# Altium PCB T35_V2.PcbDoc (part 2 of 5)
Units mil, origin at the board's own origin, x right, y up, seen from the top; angles counter-clockwise.
Board outline 2372.44 x 1023.62 mil, 12 copper layers (TOP, L2-G, L3, L4-G, L5, L6-V, L7-V, L8, L9-G, L10, L11-G, BOTTOM), stack 62.192 mil thick; 356 components, 288 nets, 1478 pads, 832 vias.
Unrouted connection lines stored in the file: 19.
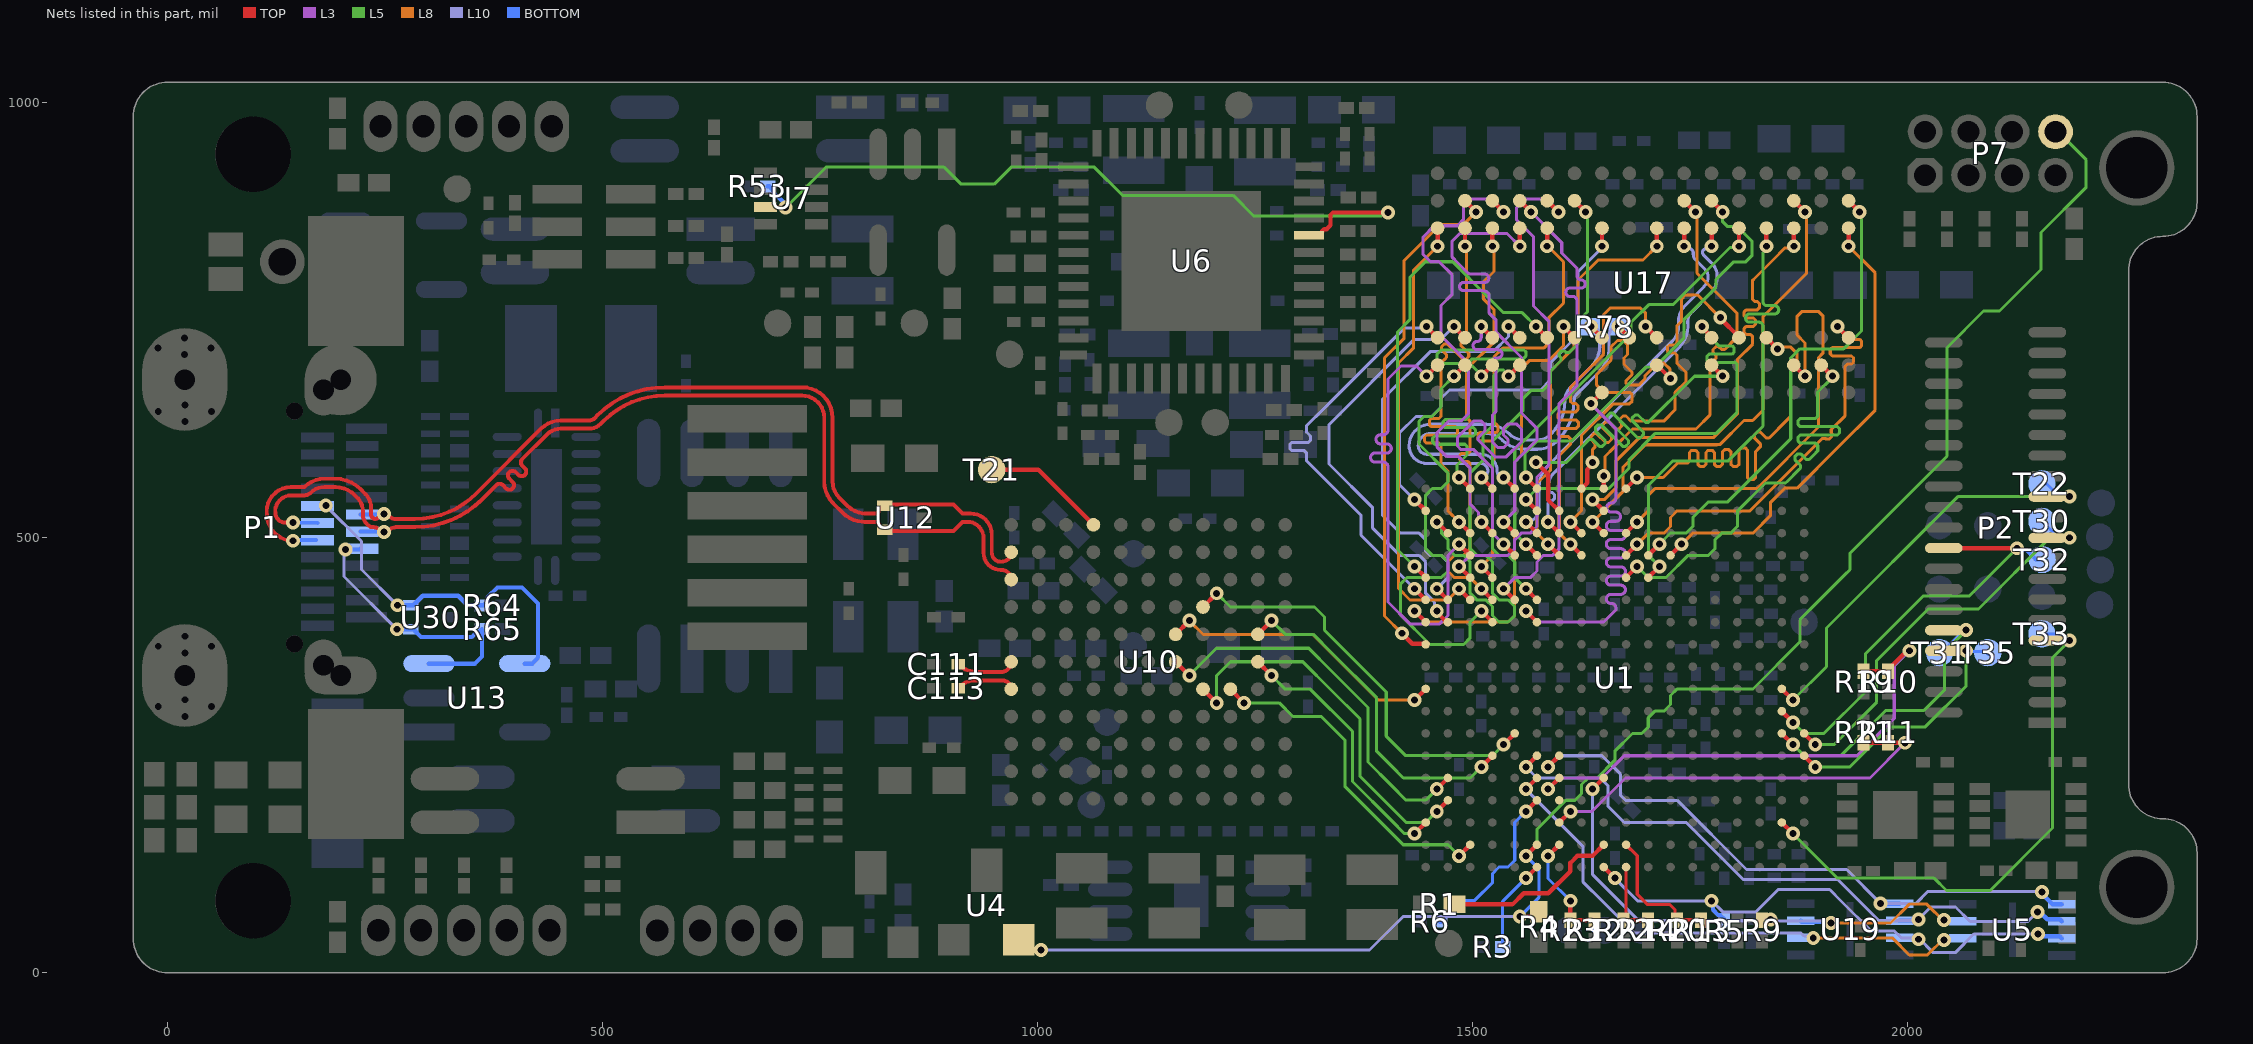
[diagram p12: the nets of this part, all layers, seen from the top]

## Part data
C1 C2 C3 C4 C6 C7 C8 C9 C10 C11 C13 C14 C15 C16 C17 C18 C21 C22 C24 C25 C27 C28 C29 C30 C31 C32 C33 C34 C35 C37 C38 C39 C41 C42 C43 C45 C47 C49 C51 C52 C54 C55 C57 C58 C60 C62 C63 C65 C66 C102 C103 C104 C105 C106 C107 C112 C114 C115 C118 C119 C120 C121 C138 C139 C140 C141 C142 C143 C144 C145 C146 C147 C148 C149 C150 C151 C152 C153 C154 C155 C156 C157 C158 C159: library part CAP, "贴片电容"
  C2 C4 C104 C119: ComponentLink1Description=Link, ComponentLink1URL=https://item.szlcsc.com/456838.html
  C6 C8 C10 C13 C15 C17 C21 C24 C27 C34 C37 C41 C51 C54 C57 C60 C62 C65 C102 C148 C149 C150 C151 C152 C153: Link=https://item.szlcsc.com/78065.html
  C7 C9 C11 C14 C16 C18 C22 C25 C28 C30 C31 C33 C35 C38 C39 C42 C43 C45 C47 C49 C52 C55 C58 C63 C66 C112 C115 C120 C138 C139 C140 C141 C154 C155 C156 C157 C158 C159: Link=https://item.szlcsc.com/456838.html
  C29 C142 C143 C144 C145: Link=https://item.szlcsc.com/54083.html
  C114: ComponentLink1Description=Link, ComponentLink1URL=https://item.szlcsc.com/3348367.html
  C146 C147: Link=https://item.szlcsc.com/152108.html
C5 C12 C19 C20 C23 C26 C36 C40 C44 C46 C48 C50 C53 C56 C59 C61 C64 C110 C111 C113 C116 C117 C122 C123 C124 C125 C126 C127 C128 C129 C130 C131 C132 C133 C134 C135 C136 C137: library part "CAPACITOR NON-POL", "贴片电容"
  C5 C12 C19 C20 C23 C26 C36 C40 C44 C46 C48 C50 C53 C56 C59 C61 C64: Link=https://item.szlcsc.com/359940.html
  C110 C122 C126: Link=https://item.szlcsc.com/3277786.html
  C111 C113: Link=https://item.szlcsc.com/456838.html, Text Field1=20, Text Field2=10
  C116: Text Field1=20, Text Field2=10
  C117 C123 C125 C127 C128 C129 C130 C131 C134 C135 C136 C137: Link=https://item.szlcsc.com/456838.html
  C124 C132 C133: Link=https://item.szlcsc.com/60514.html
C67 C68 C69 C70 C71 C72 C73 C74 C75 C76 C77 C79 C80 C81 C82 C83 C84 C85 C87 C88 C89 C90 C91 C92 C93 C94 C96 C97 C98 C99 C101: library part "0402 100nF (104) 10% 16V", "贴片电容"
  C67 C72: Link=https://item.szlcsc.com/3277786.html
  C68 C77 C80 C85 C88 C93 C94 C98 C99: Link=https://item.szlcsc.com/456838.html
  C69 C70: Link=https://item.szlcsc.com/315294.html
  C73: Link=https://item.szlcsc.com/54083.html
  C75: ComponentLink1Description=Link, ComponentLink1URL=https://item.szlcsc.com/78065.html
C78 C86 C95 C100: library part "3216 10uF (106) 10% 16V", "贴片电容", Link=https://item.szlcsc.com/60514.html
CRY1: library part CRY-4S, "无源晶振"
ECP1: library part ELECTRO1, "钽电容"
FB1 FB2 FB3 FB4 FB5 FB7 FB8 FB9: library part Inductor, "贴片磁珠"
  FB1 FB2 FB3 FB4 FB5: Link=https://item.szlcsc.com/948048.html
  FB7 FB8 FB9: Link=https://item.szlcsc.com/373740.html
FB6: library part INDUCTOR, "贴片磁珠"
L1 L2 L3 L4: library part INDUCTOR, "功率电感", Link=https://item.szlcsc.com/271084.html
L5: library part INDUCTOR, "功率电感", PartNumber=BDCD00201610R47MS1, Link=https://item.szlcsc.com/3012718.html
LED1: library part LED1, "红色LED", LatestRevisionDate=08-Jul-2005, LatestRevisionNote="Mech Layer 1 removed.", Link=https://item.szlcsc.com/142008.html, PackageReference=LED-1, Published=8-Jun-2000, Publisher="Altium Limited"
LED2: library part LED1, "绿色LED", LatestRevisionDate=08-Jul-2005, LatestRevisionNote="Mech Layer 1 removed.", Link=https://item.szlcsc.com/142012.html, PackageReference=LED-1, Published=8-Jun-2000, Publisher="Altium Limited"
LED3: library part LED1, "蓝色LED", LatestRevisionDate=08-Jul-2005, LatestRevisionNote="Mech Layer 1 removed.", Link=https://item.szlcsc.com/142013.html, PackageReference=LED-1, Published=8-Jun-2000, Publisher="Altium Limited"
P1: "USB Type-C连接器"
P2: "0.3mm间距39PinFPC插座"
P3 P5: library part "Header 5", "1.25mm间距5Pin插座", LatestRevisionDate=17-Jul-2002, LatestRevisionNote="Re-released for DXP Platform.", Publisher="Altium Limited"
P4: "导星口RJ11"
P6: library part Con_4, "1.25mm间距4Pin插座"
P7: library part 1.27mm2*4JTAGSocket, "1.25mm间距2*4 8PinJTAG烧写座", Link=https://item.szlcsc.com/3294771.html
P8: "弹簧针"
PAD1 PAD2 PAD3 PAD4: "固定孔"
R1 R2 R24 R25 R26 R27 R28 R29 R30 R31 R32 R33 R34 R35 R36 R37 R38 R39 R40 R41 R42 R43 R44 R45 R46 R47 R48 R49 R50 R51 R52 R53 R54 R55 R56 R64 R65 R66 R67 R98 R99 R100: library part RES1, "贴片电阻"
R3 R4 R5 R6 R7 R8 R9 R10 R11 R12 R13 R14 R15 R16 R17 R18 R19 R20 R21 R22 R23 R57 R58 R59 R60 R61 R62 R69 R74 R75 R76 R77 R78 R79 R80 R81 R82 R83 R84 R86 R87 R88 R89 R90 R91 R92 R93 R94 R95 R96 R97 R101 R102 R103 R104: library part RES2, "贴片电阻"
R68 R70 R71 R72: library part Res3, "贴片电阻", LatestRevisionDate=29-May-2009, LatestRevisionNote="IPC-7351 Footprint Added.", PackageDescription="Chip Resistor", PackageReference=J1-0603, Published=8-Jun-2000, Publisher="Altium Limited"
SJ1 SJ2: library part SolderableJumper
T1 T2 T3 T4 T5 T6 T8 T9 T10 T11 T12 T13 T14 T15 T16 T17 T18 T19 T20 T21 T22 T23 T24 T25 T26 T27 T28 T29 T30 T31 T32 T33 T34 T35 T36: library part TP, "测试点"
U1: "FPGA芯片", SPLIT_INST=TRUE, SWAP_INFO=(S1+S2+S3+S4+S5+S6+S7+S8+S9+S10+S11+S12+S13+S14+S15+S16+S17)
U2 U3: library part 24LC00, "贴片有源晶振"
U4 U14: library part MAX809, "复位芯片"
U5 U19: library part GD25Q64ESIG, "SPI Flash"
U6: "电源芯片", Package="VQFN-48 Texas Instruments", Availability=Good, MF="Texas Instruments", MP=TPS65400RGZT, Price="3.95 USD", SnapEDA_Link=https://www.snapeda.com/parts/TPS65400RGZT/Texas%20Instruments/view-part/?ref=snap
U7: library part TPS628501, "电源芯片"
U8: library part TPS793-XX, "电源芯片"
U9: "时序排序器"
U10: library part CYUSB3014, "FX3芯片"
U11: "USB过压过流保护芯片"
U12 U21 U28 U29 U30: "ESD保护器件"
U13: "比较器"
U15: "I2C电平转换芯片"
U16 U18: library part 24LC00, "EEPROM芯片", Text Field1=60, Text Field2=50
U17: library part MT41K512M16HA-125IT, "DDR3芯片"
U20 U22 U23 U24 U25 U26: library part TLP281_1, "光耦"
  U25: ComponentLink1Description=Link, ComponentLink1URL=https://item.szlcsc.com/91059.html
U27: "USB3.0选通芯片"

## Via types
v1: diameter 16, hole 8, TOP to BOTTOM, tented both sides, 832 vias

## Nets (pads, with @x,y where several pads share a name; then routed paths per layer and width w, separated by ;. In a path a pad name is that pad's centre, name@x,y a point inside that pad or via, vN(x,y) a via of type N, cw(c..) or ccw(c..) an arc to the next point about the centre after c; other vN are vias at no path point)
A0: U1.U15 U10.H5 | length 451.8
  TOP w5: U10.H5@1190.4,325.99 v1(1206.15,310.25) ; v1(1459.12,185.53) U1.U15@1471.91,198.32
  L5 w3.5: v1(1206.15,310.25) 1206.15,341.74 1221.9,357.49 1305.15,357.49 1338.2,324.44 1370.75,291.88 1370.75,225.89 1423.86,172.78 1446.37,172.78 v1(1459.12,185.53)
A1: U1.T17 U10.J5 | length 391.5
  TOP w5: U10.J5@1221.9,325.99 v1(1237.64,310.25) ; v1(1484.71,134.35) U1.T17@1497.5,147.14
  L5 w3.5: v1(1237.64,310.25) 1277.95,310.25 1293.7,294.5 1326.31,294.5 1353.75,267.05 1353.75,213.8 1420.41,147.14 1471.91,147.14 v1(1484.71,134.35)
aa_N: C111.1 U10.A6 | length 70.1
  TOP w4.5: C111.1@909,354.72 ccw(c930.99,376.71) 928.1,345.74 ccw(c930.99,376.71) 930.99,345.61 958.05,345.61 ccw(c958.05,357.49) U10.A6@969.93,357.49
aa_P: C113.1 U10.A5 | length 69.4
  TOP w4.5: C113.1@909,327 910.95,328.95 cw(c928.23,311.67) 928.23,336.11 959.81,336.11 cw(c959.81,325.99) U10.A5@969.93,325.99
AMPV: P2.23 T22.1 U1.B10 | length 520.7
  TOP w5: U1.B10@1855.77,326.28 v1(1868.57,313.48) ; P2.23@2161,547.24 2186.66,547.24 v1(2186.66,547.32)
  L5 w3.5: v1(1868.57,313.48) 1907,351.91 1907,396.2 2058.04,547.24 2186.59,547.24 v1(2186.66,547.32)
  BOTTOM w3.5: T22.1@2154.8,562 2159.91,562 2173.41,548.5 2184.5,548.5 v1@2185,548
CBSEL0: R13.2 R20.2 U1.J17 | length 153.7
  TOP w3.5: 1701.2,78.56 1726.89,78.56 1732.9,72.55 1732.9,62.93 R20.2@1735.33,60.49
  TOP w4: U1.J17@1676.64,147.14 1689.43,134.35 1689.43,90.32 1701.2,78.56
  TOP w5: R20.2@1735.33,60.49 R13.2@1762.99,60.49
CBSEL1: R14.2 R22.2 U1.J18 | length 89.8
  TOP w3.5: R22.2@1676.64,63.11 U1.J18@1676.64,121.55
  TOP w5: R22.2@1676.64,63.11 R22.2@1674.02,60.49 R14.2@1701.68,60.49
CBUS0: R10.2 R19.2 U1.M14 | length 598.1
  TOP w5: v1(1587.07,211.12) U1.M14@1599.87,223.91 ; R19.2@1949.85,346.46 R10.2@1977.94,346.46 1977.94,348.43 1999.66,370.15 v1(2002.37,370.15)
  L3 w3.5: v1(1587.07,211.12) 1599.82,223.87 1648.94,223.87 1674.55,249.48 1942.06,249.48 1985,292.43 1985,352.78 v1(2002.37,370.15)
CBUS1: R11.2 R21.2 U1.M16 | length 483.1
  TOP w5: U1.M16@1599.87,172.73 v1(1612.66,185.53) ; R21.2@1949.85,264.38 R11.2@1977.94,264.38 v1(1997.44,264.38)
  L3 w3.5: v1(1612.66,185.53) 1637.53,185.53 1675.96,223.96 1957.02,223.96 v1(1997.44,264.38)
CBUS2: R12.2 R23.2 U1.M17 | length 130.2
  TOP w5: v1(1587.07,134.35) U1.M17@1599.87,147.14 ; v1(1612.71,82.75) R23.2@1612.71,60.49 R12.2@1640.36,60.49
  BOTTOM w3.5: v1(1587.07,134.35) 1587.07,108.39 v1(1612.71,82.75)
CC1: P1.A5 R65.2 U13.3 U30.1 | length 336.2
  L10 w3.5: v1(204.69,486.62) 203,484.92 203,455.6 v1(263.72,394.88)
  BOTTOM w5: v1(204.69,486.62) 221.09,486.62 P1.A5@221.87,487.4 ; v1(263.72,394.88) U30.1@279.63,394.88 282.58,394.88 291.43,386.04 349.94,386.04 354.4,390.49 357.25,390.49 R65.2@361.64,394.88 361.64,363.58 353.41,355.35 U13.3@300.51,355.35
CC2: P1.B5 R64.2 U13.4 U30.2 | length 418.8
  L10 w3.5: v1(182,537) 223.12,495.87 223.12,463.57 v1(264.25,422.44)
  BOTTOM w5: v1(264.25,422.44) U30.2@279.63,422.44 282.58,422.44 293.58,433.44 334.18,433.44 345.18,422.44 R64.2@361.64,422.44 363.61,422.44 368,426.83 368,431.53 379.4,442.94 407.56,442.94 426,424.5 426,362.14 419.22,355.35 U13.4@410.74,355.35
CCK: U1.N13 U5.6 U19.6 | length 765.8
  TOP w5: v1(1561.48,236.71) U1.N13@1574.28,249.5
  L10 w3.5: v1(1561.48,236.71) 1574.23,223.96 1647.04,223.96 1655.97,215.03 1655.97,191.37 1674.65,172.69 1745.9,172.69 1811.38,107.2 1920.09,107.2 1928.17,99.12 1967.5,59.79 2012.79,59.79 v1@2013.59,60.59 ; v1(2012.79,61.39) 2026.93,75.53 2055.47,75.53 2071.82,59.18 2138.76,59.18 v1(2149.53,69.94)
  BOTTOM w5: U19.6@1991.08,59.79 v1@2012.79,59.79 ; v1(2149.53,69.94) 2152.5,69.94 2160.84,61.6 2175.22,61.6 U5.6@2177.64,59.18
CDI0: U1.M13 U5.5 U19.5 | length 733.6
  TOP w5: v1(1587.07,236.71) U1.M13@1599.87,249.5
  L10 w3.5: v1(1587.07,236.71) 1599.82,249.46 1649.13,249.46 1670.47,228.13 1670.47,203.77 1675.96,198.28 1735.42,198.28 1815.1,118.6 1928.17,118.6 1930.24,118.6 v1(1969.36,79.48) 2009.52,79.48 2023.66,93.61 2154.32,93.61 v1(2155.01,92.93)
  BOTTOM w5: v1(1969.36,79.48) U19.5@1991.08,79.48 ; v1(2155.01,92.93) 2155.01,90.67 2166.81,78.86 U5.5@2177.64,78.86
CDI1: U1.N14 U5.2 U19.2 | length 609.6
  TOP w5: v1(1561.48,211.12) U1.N14@1574.28,223.91
  L8 w3.5: v1(1891.85,40.05) 1891.9,40.11 1982.68,40.11 2002.37,20.42 2023.08,20.42 v1@2042.15,39.49
  L10 w3.5: v1(1561.48,211.12) 1627.06,145.54 1627.06,104.75 1649.78,82.02 1686.02,45.79 1877.73,45.79 1881.08,42.44 1889.46,42.44 v1(1891.85,40.05)
  other v1: 2042.15,37.89
CDI2: R9.1 U1.K14 U5.3 U19.3 | length 607.1
  TOP w5: v1(1638.25,211.12) U1.K14@1651.05,223.91 ; R9.1@1832.74,60.49 1833.59,61.34 v1(1842.98,61.34)
  L8 w3.5: v1(1912.24,57.22) 1980.73,57.22 2002.37,78.86 2022.46,78.86 v1@2042.15,59.18
  L10 w3.5: v1(1638.25,211.12) 1638.25,112.75 1691.21,59.79 1842.98,59.79 1843.49,59.28 1910.18,59.28 v1(1912.24,57.22)
  BOTTOM w5: U19.3@1877.3,59.79 1878.58,58.51 1910.96,58.51 v1(1912.24,57.22)
  other v1: 2042.15,60.78
CDI3: R5.1 U1.K18 U5.7 U19.7 | length 629.8
  TOP w5: U1.K18@1651.05,121.55 v1(1663.84,108.76)
  L10 w3.5: v1(1663.84,108.76) 1689.85,82.75 v1(1774.99,82.75) 1787.74,70 1825.97,70 1837.99,82.02 1851.57,95.6 1910.8,95.6 1924.38,82.02 1958.4,48 1985.05,48 1992.94,40.11 2012.79,40.11 2029.76,23.14 2055.14,23.14 2076.52,44.52 v1(2150.04,44.52)
  BOTTOM w5: v1(1774.99,82.75) 1776.6,81.14 1776.6,72.44 1783.11,65.93 1785.07,65.93 1789.46,61.55 R5.1@1789.46,59.58 ; v1(2150.04,44.52) 2153.02,44.52 2155.62,41.91 2175.22,41.91 U5.7@2177.64,39.49
  other v1: 2012.79,38.51
CDONE: R3.2 U1.N18 | length 108.2
  TOP w5: v1(1561.48,108.76) U1.N18@1574.28,121.55
  BOTTOM w3.5: R3.2@1534.83,29.67 1534.83,82.02 1534.83,82.11 v1(1561.48,108.76)
CHARGER_DECT: T21.1 U10.D11 | length 143.1
  TOP w5: T21.1@947.56,578.38 1001,578.38 U10.D11@1064.42,514.97
CLK_50MHz: R1.2 U1.K17 | length 205.7
  TOP w5: R1.2@1479.35,78.56 1521.44,78.56 1546.05,78.56 1558.96,91.47 1587.35,91.47 1612.66,116.78 1612.66,126.32 1620.69,134.35 1638.25,134.35 U1.K17@1651.05,147.14
CLK_OUT: R53.1 U6.44 U7.3 | length 919.4
  TOP w5: U7.3@687.68,880.25 687.9,880.02 710.41,880.02 v1(710.64,879.8) ; U6.44@1312.09,847.76 1324.29,847.76 1326.91,850.38 1326.91,851.9 1329.84,854.83 1332.52,854.83 1336.91,859.22 1336.91,871.07 1339.84,874 v1(1403,874)
  L5 w3.5: v1(710.64,879.8) 756.94,926.1 892.78,926.1 912.35,906.53 950.35,906.53 969.93,926.1 1065.42,926.1 1097.89,893.64 1225.07,893.64 1248.7,870 1395.62,870 1399.62,874 v1(1403,874)
  BOTTOM w5: R53.1@689.81,904 691.78,904 696.17,899.61 696.17,897.64 708.53,885.28 708.53,881.9 v1(710.64,879.8)
CMOS_CTL1: P2.10 T31.1 U1.B12 | length 379.8
  TOP w5: U1.B12@1855.77,275.09 v1(1868.57,262.3) ; P2.10@2041.92,393.7 v1(2067.58,393.77) v1(2067.58,393.77)
  L5 w3.5: v1(1868.57,262.3) 1881.36,249.5 1923.31,249.5 1975.48,301.68 2019.38,301.68 2042.93,325.23 2042.93,369.12 v1(2067.58,393.77)
  BOTTOM w3.5: T31.1@2037,368 2039.4,368 2067,395.6 v1@2067,397 ; v1@2063.66,391.66 v1@2066,394
CMOS_CTL2: P2.9 T33.1 U1.B16 | length 659.1
  TOP w5: U1.B16@1855.77,172.73 v1(1868.57,159.94) ; P2.9@2161,381.89 2186.66,381.89 v1(2186.66,381.96)
  L5 w3.5: v1(1868.57,159.94) 1919.79,108.71 2030.89,108.71 2045,94.6 2095.16,94.6 2166.88,166.32 2166.88,362.18 v1(2186.66,381.96)
  BOTTOM w3.5: T33.1@2154.8,389.55 2175.8,389.55 2183.35,382 v1@2188,382
CMOS_CTL3: P2.8 T35.1 U1.A13 | length 325.4
  TOP w5: U1.A13@1881.36,249.5 v1(1894.16,236.71) ; P2.8@2041.92,370.08 2067.58,370.08 v1(2067.58,370.15)
  L5 w3.5: v1(1894.16,236.71) 1934.19,236.71 1980.13,282.65 2020.67,282.65 2067.58,329.57 v1(2067.58,370.15)
  BOTTOM w3.5: v1(2067.58,370.15) 2068.66,369.08 v1@2069,369.08 ; v1@2069,371 v1@2069,369.08 ; T35.1@2093,366 2089.92,369.08 v1@2069,369.08
CMOS_CTL4: P2.19 T30.1 U1.A12 | length 504.7
  TOP w5: U1.A12@1881.36,275.09 v1(1894.16,262.3) ; P2.19@2161,500 v1(2186.66,500.07) v1(2186.66,500.07)
  L5 w3.5: v1(1894.16,262.3) 1916.02,262.3 1964.82,311.1 1964.82,359.02 2023.95,418.15 2081.83,418.15 2163.67,500 2186.59,500 v1(2186.66,500.07)
  BOTTOM w3.5: T30.1@2154.8,518.89 2173.41,500.28 2185.72,500.28 v1@2188,498
CMOS_CTL5: P2.18 T32.1 U1.B11 | length 516
  TOP w5: U1.B11@1855.77,300.69 v1(1868.57,287.89) ; P2.18@2041.92,488.19 2042.02,488.09 2125.91,488.09 v1(2126,488)
  L5 w3.5: v1(1868.57,287.89) 1881.36,275.09 1904.09,275.09 1951.85,322.85 1951.85,366.85 2018.17,433.17 2071.17,433.17 v1(2126,488)
  BOTTOM w5: v1@2124,488 2126.1,485.9 2136.93,485.9 2147.83,475 T32.1@2155,475 ; v1@2129.52,488.52 v1@2130,489
CRESET_N: P7.8 R4.2 U1.N17 U4.2 | length 1909.7
  TOP w5: v1(1554.52,64.49) 1570.78,64.49 R4.2@1576.4,70.11 ; v1(1561.48,134.35) U1.N17@1574.28,147.14
  L5 w3.5: v1(1561.48,134.35) 1574.23,147.1 1574.23,165.13 1607.43,198.32 1617.9,198.32 1625.41,205.84 1625.41,216.31 1633.06,223.96 1643.53,223.96 1663.84,244.27 1663.84,254.74 1684.15,275.05 1694.62,275.05 1702.18,282.61 1702.18,293.08 1709.79,300.68 1720.26,300.68 1727.86,308.29 1727.86,318.76 1735.1,325.99 1735.33,326.23 1822.58,326.23 1876.46,380.12 1876.46,405.71 1928.17,457.42 1934.19,463.43 1934.19,482.4 2045.58,593.79 2045.58,718.58 2087.65,760.65 2105.85,760.65 2153.6,808.4 2153.6,850.9 2205.6,902.9 2205.6,934.4 P7.8@2161,979
  L10 w3.5: v1(1004.38,26.09) 1381.88,26.09 1420.28,64.49 v1(1554.52,64.49)
  BOTTOM w3.5: v1(1554.52,64.49) 1576.4,86.37 1576.4,119.43 v1(1561.48,134.35)
CSI: R6.2 U1.N15 | length 201.7
  TOP w5: v1(1561.48,185.53) U1.N15@1574.28,198.32
  BOTTOM w3.5: R6.2@1464.78,58.7 1488.11,82.02 1489.36,83.28 1502.86,83.28 1523.05,103.47 1523.05,113.95 1530.61,121.51 1541.08,121.51 1548.73,129.16 1548.73,172.78 v1(1561.48,185.53) v1@1561.95,186
  BOTTOM w5: R6.2@1462.81,58.7 R6.2@1464.78,58.7
CSO: U1.M15
CTL1: U1.R13 U10.K7 | length 397.6
  TOP w5: U10.K7@1253.39,388.99 v1(1269.14,404.73) ; v1(1510.3,236.71) U1.R13@1523.09,249.5
  L5 w3.5: v1(1269.14,404.73) 1284.89,388.99 1317.01,388.99 1338.2,367.8 1390,316 1390,254.64 1406.8,237.85 1420.69,223.96 1497.55,223.96 v1(1510.3,236.71)
CTL4: U1.V10 U10.G7 | length 337
  TOP w5: U10.G7@1158.9,388.99 v1(1174.65,404.73) ; v1(1433.53,313.48) U1.V10@1446.32,326.28
  L8 w3.5: v1(1174.65,404.73) 1190.4,388.99 1316.21,388.99 1338.2,367 1391.71,313.48 1406.8,313.48 v1(1433.53,313.48)
CTL5: U1.U14 U10.G6 | length 452.2
  TOP w5: U10.G6@1158.9,357.49 v1(1174.65,341.74) ; v1(1459.12,211.12) U1.U14@1471.91,223.91
  L5 w3.5: v1(1174.65,341.74) 1205.92,373.01 1311.99,373.01 1338.2,346.8 1380,305 1380,242.19 1406.8,215.39 1423.82,198.37 1446.37,198.37 v1(1459.12,211.12)
CTL6: U1.V16 U10.K6 | length 315.9
  TOP w5: U10.K6@1253.39,357.49 v1(1269.14,341.74) ; v1(1433.53,159.94) U1.V16@1446.32,172.73
  L5 w3.5: v1(1269.14,341.74) 1284.89,325.99 1313.76,325.99 1362.25,277.5 1362.25,219.75 1406.8,175.2 1422.06,159.94 v1(1433.53,159.94)
  L10 w5: v1@1431.5,159.94 v1(1433.53,159.94)
CTL7: U1.P12 U10.H8 | length 491.4
  TOP w5: U10.H8@1190.4,420.48 v1(1206.15,436.23) ; v1(1535.89,262.3) U1.P12@1548.69,275.09
  L5 w3.5: v1(1206.15,436.23) 1221.9,420.48 1318.52,420.48 1330,409 1330,393.85 1338.2,385.66 1401,322.85 1401,272 1423.45,249.55 1436,249.55 ; 1436,249.5 1523.09,249.5 v1(1535.89,262.3)
D_N: P1.A7 P1.B7 U10.A10 U12.1 | length 1236.5
  TOP w4.5: v1(144.32,496.59) cw(c144.32,526.4) 114.51,525.65 cw(c142.11,530.36) 141.78,558.36 157.52,558.34 157.56,558.38 cw(c180.44,535.5) 180.44,567.86 193.08,567.86 cw(c193.08,527.1) 221.9,555.92 227.39,550.43 cw(c210.95,533.99) 234.2,533.99 234.2,526.26 ccw(c238.79,526.26) 235.54,523.02 ; 235.57,523 ccw(c238.75,526.18) 237.86,521.77 ccw(c238.75,526.18) 238.75,521.68 ccw(c238.75,526.18) 241.92,522.99 ; 241.93,523 244.5,525.56 cw(c249,521.06) v1(249,527.43) cw(c249,521.06) 253.5,525.56 ccw(c262.88,534.95) 262.88,521.68 284.26,521.68 ccw(c284.26,621.68) 324.19,530 ccw(c284.26,621.68) 354.97,550.97 429.41,625.41 ; 429.44,625.44 cw(c452.35,602.48) 452.35,634.91 484.51,634.91 ccw(c484.51,644.49) 491.28,637.72 494.57,641.01 cw(c571.81,563.78) 571.81,673 729.57,673 cw(c729.57,638.07) 764.5,638.07 764.5,564.72 ccw(c790.53,564.72) 772.13,546.31 ; 772.12,546.31 781.74,536.69 ccw(c803.03,557.98) 800.29,528 ccw(c803.03,557.98) 803.03,527.88 813.63,527.87 ccw(c813.63,532.37) 816.81,529.19 817.16,529.54 ccw(c814.83,531.88) 818.13,531.88 cw(c821.44,531.88) 819.09,534.21 U12.1@819.7,534.82 ; U12.1@824.74,536.9 ccw(c824.74,529.78) 819.71,534.82 823.26,538.37 903.5,538.37 914,527.87 923.42,527.87 cw(c923.42,503.74) 947.56,503.74 947.56,482.97 ccw(c958.05,482.97) 958.05,472.48 958.93,472.48 ccw(c958.93,483.47) U10.A10@969.93,483.47
  BOTTOM w4.5: v1(144.32,496.59) 144.97,497.24 P1.B7@170.69,497.24 ; P1.A7@221.87,526.77 P1.A7@223.67,526.77 248.34,526.77 v1(249,527.43)
D_P: P1.A6 P1.B6 U10.A9 U12.2 | length 1236.5
  TOP w4.5: v1(144.32,517.59) 135.41,517.59 cw(c135.41,529) 124.01,528.51 cw(c142.33,530.41) 142.33,548.83 157.54,548.84 ccw(c157.54,558.3) 164.23,551.61 ; 164.26,551.64 cw(c180.47,535.42) 180.47,558.36 193,558.36 cw(c193,526.9) 215.24,549.15 218.67,545.71 cw(c202.09,530.33) 224.7,530.33 224.7,526.23 ccw(c238.69,526.23) 228.8,516.33 230.24,514.89 ccw(c236.78,521.43) 236.78,512.18 cw(c236.78,502.93) 243.32,509.47 244.5,508.29 ccw(c249,512.79) v1(249,506.43) ccw(c249,512.79) 253.5,508.29 cw(c262.88,498.91) 262.88,512.18 284.37,512.18 ccw(c284.37,621.4) 326.19,520.5 ccw(c284.37,621.4) 335.33,524.8 ccw(c284.37,621.4) 361.6,544.17 369.05,551.61 378.06,560.63 cw(c381.77,556.91) 385.49,560.63 389.38,556.74 ccw(c393.09,560.45) 396.8,556.74 ccw(c393.09,560.45) 396.8,564.16 392.91,568.05 cw(c396.62,571.76) 392.91,575.48 cw(c396.62,571.76) 400.34,575.48 403.47,572.34 ccw(c407.19,576.05) 410.9,572.34 ccw(c407.19,576.05) 410.9,579.76 407.76,582.9 cw(c411.47,586.61) 407.76,590.33 436.11,618.67 437.25,619.74 cw(c452.38,602.4) 439.03,621.14 cw(c452.38,602.4) 452.38,625.41 484.58,625.41 ccw(c484.58,644.33) 497.95,630.95 501.21,634.21 cw(c571.92,563.5) 571.92,663.5 729.49,663.5 cw(c729.49,637.99) 755,637.99 755,564.68 ccw(c790.44,564.68) 765.35,539.65 ; 765.38,539.62 776.42,528.58 ccw(c801.06,553.23) 798.11,518.5 ccw(c801.06,553.23) 801.06,518.38 813.63,518.37 cw(c813.63,513.88) 816.81,517.06 817.16,516.71 cw(c814.83,514.37) 818.13,514.37 ccw(c821.44,514.37) 819.09,512.04 819.7,511.43 ccw(c824.74,516.47) U12.2@824.74,509.35 826.21,507.87 903.5,507.87 914,518.37 919.49,518.37 cw(c919.49,499.81) 938.06,499.81 938.06,482.97 ccw(c958.05,482.97) 958.05,462.98 958.93,462.98 cw(c958.93,451.98) U10.A9@969.93,451.98
  BOTTOM w4.5: v1(144.32,517.59) 144.64,517.26 172.16,517.26 P1.B6@172.49,516.93 ; P1.A6@221.87,507.09 P1.A6@223.67,507.09 248.34,507.09 v1(249,506.43)
DDR_A0: U1.P3 U17.N3 | length 575.6
  TOP w5: v1(1535.89,518.21) U1.P3@1548.69,505.41 ; v1(1554.52,835.13) U17.N3@1554.52,856
  L3 w3.5: v1(1535.89,518.21) 1548.73,531.05 1548.73,587.21 1574.52,612.99 1574.52,625.43 1556.47,643.47 1556.47,707.2 1526.97,736.7 1526.97,750.64 1519.39,758.22 1519.39,779.93 1517.64,781.68 ccw(c1511.9,775.94) 1511.9,784.05 1490.03,784.05 cw(c1490.03,788.8) 1490.03,793.55 1514.16,793.55 ccw(c1514.16,798.3) 1514.16,803.05 1498.23,803.05 cw(c1498.23,807.8) 1494.87,804.44 1482.86,816.46 1476.78,822.54 1476.78,841.24 1485.42,849.88 1539.77,849.88 v1(1554.52,835.13)
DDR_A1: U1.P4 U17.P7 | length 575.6
  TOP w5: v1(1510.23,742.81) U17.P7@1523.02,730.02 ; v1(1535.89,492.61) U1.P4@1548.69,479.82
  L3 w3.5: v1(1510.23,742.81) 1510.23,738.36 1510.23,730.49 cw(c1505.48,730.49) 1505.48,725.74 ccw(c1505.48,720.99) 1505.48,716.24 1529.33,716.24 cw(c1529.33,711.49) 1529.33,706.74 1527.89,706.74 ccw(c1527.89,701.99) 1523.14,701.99 1523.14,697.56 1526.97,693.73 1526.97,693.12 1526.97,644.97 1523.14,641.14 1523.14,610 1529.48,603.66 1535.89,603.66 1541.08,608.85 1541.08,613.17 1539.03,615.22 1538.89,615.22 1535.89,618.22 1535.89,625.82 1541.06,630.99 1550.57,630.99 1556.47,625.09 1556.47,610.54 1538.94,593 1526.04,593 1506.72,612.32 1506.72,615.22 1514.5,623 1514.5,629.86 1510.3,634.06 1501.44,634.06 1482.86,615.48 1482.86,605.52 1487.02,601.36 1501.64,601.36 1523.14,579.86 1523.14,505.36 v1(1535.89,492.61)
DDR_A2: U1.R6 U17.P3 | length 522.2
  TOP w5: v1(1510.3,441.43) U1.R6@1523.09,428.64 ; v1(1523.02,835.12) 1523.02,842.09 U17.P3@1523.02,856
  L8 w3.5: v1(1510.3,441.43) 1497.55,454.18 1479.52,454.18 1471.96,461.74 1471.96,472.31 1479.43,479.77 1489.9,479.77 1497.55,487.42 1497.55,579.63 1497.55,583.49 1497.55,585.24 1495.17,587.62 1487.52,587.62 1485.15,589.99 1485.15,594.74 1487.52,597.12 1495.17,597.12 1497.55,599.49 1497.55,603.4 1497.55,634 1493.48,638.07 1493.48,694 1525,725.52 1525,741 1524.98,762.2 1512.55,774.62 1512.55,793.75 1524.98,806.18 1524.98,833.02 v1@1522,836
DDR_A3: U1.P6 U17.N2 | length 575.6
  TOP w5: v1(1535.89,441.43) U1.P6@1548.69,428.64 ; U17.N2@1554.52,887.5 v1(1567.32,874.7)
  L3 w3.5: v1(1535.89,441.43) 1548.64,454.18 1566.67,454.18 1574.27,461.79 1574.27,472.26 1581.81,479.8 1592.28,479.8 1599.82,487.33 1599.82,654.36 1620.2,674.74 1620.2,732.2 1620.2,771.01 1620.2,772.76 ccw(c1615.45,772.76) 1615.45,777.51 1612.03,777.51 cw(c1612.03,782.26) 1612.03,787.01 1624.95,787.01 ccw(c1624.95,791.76) 1624.95,796.51 cw(c1624.95,801.26) 1620.2,801.26 1620.2,809.83 1609.97,820.06 1602.76,827.27 1602.76,839.25 v1(1567.32,874.7)
DDR_A4: U1.T1 U17.P8 | length 555.3
  TOP w5: v1(1484.71,569.39) U1.T1@1497.5,556.59 ; v1(1510.23,685.72) U17.P8@1523.02,698.52
  L5 w3.5: v1(1484.71,569.39) 1482.32,571.78 1482.32,583.72 1493.8,595.2 1493.8,603.4 1493.8,605.15 1491.43,607.53 1456.85,607.53 1454.48,609.9 1454.48,614.65 1456.85,617.03 1501.27,617.03 1503.65,619.4 1503.65,624.15 1501.27,626.53 1468.82,626.53 1466.44,628.9 1466.44,633.65 1468.82,636.03 1492.6,636.03 1495.48,638.9 1495.48,651.7 1495.48,689.84 1484.84,700.47 1461.17,700.47 1459.12,702.52 1459.12,710.95 1464.08,715.91 1559.43,715.91 1561.48,713.86 1561.48,708.79 1558.47,705.78 1499.78,705.78 1497.55,703.55 1497.55,699.86 1510.23,687.19 v1(1510.23,685.72)
DDR_A5: U1.R3 U17.P2 | length 580.3
  TOP w5: v1(1510.3,518.21) U1.R3@1523.09,505.41 ; U17.P2@1523.02,887.5 v1(1535.82,874.7)
  L3 w3.5: v1(1510.3,518.21) 1507.91,520.6 1507.91,525.6 1507,526.51 1507,529.06 1497.55,538.51 1497.55,579.86 1484.2,593.21 1470.6,593.21 1459.12,604.69 1459.12,620.58 1472.6,634.06 1487.02,634.06 1495.48,642.52 1495.48,700.7 1463.98,732.2 1463.98,767.1 1476.78,779.9 1476.78,802.21 1461.68,817.31 1451.79,817.31 1443.2,825.91 1443.2,845.58 1456.34,858.72 1482.86,858.72 1489.57,865.43 1489.57,880.81 1498.32,889.55 1520.96,889.55 v1(1535.82,874.7)
DDR_A6: U1.R7 U17.R8 | length 558.8
  TOP w5: v1(1478.73,685.72) U17.R8@1491.53,698.52 ; v1(1510.3,415.84) U1.R7@1523.09,403.05
  L5 w3.5: v1(1478.73,685.72) 1463.98,670.97 1463.98,650.11 1453.35,639.48 1444.31,639.48 1438.68,633.85 1438.68,607.86 1471.87,574.67 1471.87,564.11 1464.4,556.64 1453.93,556.64 1446.37,549.08 1446.37,487.33 1453.9,479.8 1464.38,479.8 1471.91,472.26 1471.91,461.79 1464.4,454.27 1424.98,454.27 1417.2,446.49 1417.2,411.6 1451.34,377.46 1489.94,377.46 1497.55,385.06 1497.55,403.09 v1(1510.3,415.84)
DDR_A7: U1.V8 U17.R2 | length 602.7
  TOP w5: v1(1419,390.25) 1430.92,378.33 1445.45,378.33 U1.V8@1446.32,377.46 ; U17.R2@1491.53,887.5 v1(1504.32,874.7)
  L8 w3.5: v1(1419,390.25) 1399.09,410.16 1399.09,706.89 1421.6,729.4 1421.6,818.8 1462.75,859.95 1489.57,859.95 v1(1504.32,874.7)
DDR_A8: U1.T4 U17.T8 | length 575.6
  TOP w5: v1(1447.24,685.72) U17.T8@1460.03,698.52 ; v1(1484.71,492.61) U1.T4@1497.5,479.82
  L3 w3.5: v1(1447.24,685.72) 1435.51,697.45 1418,697.45 1403,682.45 1403,675.6 1403,643.99 1403,623.7 cw(c1397.75,623.7) 1397.75,618.45 1394.39,618.45 ccw(c1394.39,613.2) 1394.39,607.95 1401.55,607.95 cw(c1401.55,602.7) 1401.55,597.45 1388.25,597.45 ccw(c1388.25,592.2) 1388.25,586.95 1397.75,586.95 cw(c1397.75,581.7) 1403,581.7 1403,579.95 1403,426.15 1428.04,401.11 1462.41,401.11 1471.96,410.65 1471.96,479.86 v1(1484.71,492.61)
DDR_A9: U1.T3 U17.R3 | length 522.6
  TOP w5: v1(1484.71,518.21) U1.T3@1497.5,505.41 ; v1(1491.53,835.13) U17.R3@1491.53,856
  L8 w3.5: v1(1484.71,518.21) 1471.87,531.05 1471.87,576.71 1469.18,579.4 1463.98,584.59 1463.98,603.4 1463.98,604.6 1463.98,606.35 1461.61,608.73 1447.36,608.73 1444.98,611.1 1444.98,615.85 1447.36,618.23 1480.61,618.23 1482.98,620.6 1482.98,625.35 1480.61,627.73 1452.91,627.73 1450.53,630.1 1450.53,634.85 1452.91,637.23 1461.61,637.23 1463.98,639.6 1463.98,645 1463.98,701 1468.94,705.96 1470.18,707.2 1470.18,710.56 1464.56,716.18 1464.56,719.54 1467.92,722.9 1471.28,722.9 1489.14,705.03 1492.5,705.03 1495.85,708.39 1495.85,711.75 1486.97,720.63 1486.97,723.99 1493.48,730.5 1493.48,835.52 v1@1492,837
DDR_A10: U1.V7 U17.L7 | length 529.2
  TOP w5: v1(1433.53,415.84) U1.V7@1446.32,403.05 ; v1(1604.72,742.81) U17.L7@1617.51,730.02
  L8 w3.5: v1(1433.53,415.84) 1446.28,403.09 1541.17,403.09 1548.64,410.56 1548.64,587.54 1556.47,595.38 1556.47,694.57 1565.9,704 1588,704 1604.72,720.72 1604.72,740.72 v1@1607,743
DDR_A11: U1.U7 U17.R7 | length 505.9
  TOP w5: v1(1459.12,415.84) 1459.12,414.21 1467.86,405.47 1468.18,405.47 1470.6,403.05 U1.U7@1471.91,403.05 ; v1(1478.73,742.81) U17.R7@1491.53,730.02
  L10 w3.5: v1(1459.12,415.84) 1456.73,418.23 1456.73,425.79 1446.28,436.24 1446.28,472.31 1438.81,479.77 1416.64,479.77 1385.41,511 1385.41,534.67 1335.21,584.87 1335.21,630.07 1433.2,728.06 1463.98,728.06 v1(1478.73,742.81)
DDR_A12: U1.U6 U17.N7 | length 496.6
  TOP w5: v1(1459.12,441.43) U1.U6@1471.91,428.64 ; v1(1541.72,742.81) U17.N7@1554.52,730.02
  L10 w3.5: v1(1459.12,441.43) 1471.87,454.18 1471.87,472.31 1464.4,479.77 1451.6,479.77 1446.28,485.1 1446.28,497.9 1438.81,505.36 1417.33,505.36 1396.82,525.88 1396.82,659.3 1451.5,713.98 1524.14,713.98 1541.65,731.48 1541.65,742.73 v1(1541.72,742.81)
DDR_A13: U1.T6 U17.T3 | length 531.4
  TOP w5: v1(1460.03,835.12) 1460.03,842.09 U17.T3@1460.03,856 ; v1(1484.71,441.43) U1.T6@1497.5,428.64
  L8 w3.5: v1(1460.03,835.12) 1432.49,807.58 1432.49,718.49 1415,701 1415,441.93 1428.34,428.59 1471.87,428.59 v1(1484.71,441.43)
DDR_A14: U1.V6 U17.T7 | length 502.2
  TOP w5: v1(1433.53,441.43) U1.V6@1446.32,428.64 ; v1(1447.24,742.81) U17.T7@1460.03,730.02
  L10 w3.5: v1(1433.53,441.43) 1372,502.96 1372,526 1309.2,588.8 1309.2,596.1 1309.2,597.85 1306.82,600.23 1292.57,600.23 1290.2,602.6 1290.2,607.35 1292.57,609.73 1311.68,609.73 1314.05,612.1 1314.05,616.85 1311.68,619.23 1311.57,619.23 1309.2,621.6 1309.2,628.4 1329.25,648.45 1330.91,650.11 1422.14,741.34 1445.76,741.34 v1@1446.82,742.4 ; v1(1447.24,742.81) v1@1446.82,742.4 ; v1@1449.6,742.4 v1@1446.82,742.4
DDR_A15: U1.V5 U17.M7 | length 565.8
  TOP w5: v1(1433.53,467.02) U1.V5@1446.32,454.23 ; v1(1573.22,742.81) U17.M7@1586.02,730.02
  L5 w3.5: v1(1433.53,467.02) 1414,486.55 1414,736.68 1428.13,750.8 1428.13,799.2 1446.24,817.31 1477.32,817.31 1515.68,778.96 1535.89,758.75 1557.28,758.75 v1(1573.22,742.81)
DDR_BA0: U1.T5 U17.M2 | length 599.6
  TOP w5: v1(1484.71,467.02) U1.T5@1497.5,454.23 ; U17.M2@1586.02,887.5 v1(1598.81,874.7)
  L3 w3.5: v1(1484.71,467.02) 1497.46,479.77 1541.08,479.77 1548.68,487.38 1548.68,497.85 1556.22,505.39 1566.69,505.39 1574.32,513.01 1574.32,569.88 1587.97,583.53 1587.97,748.92 1570.36,766.53 1570.36,846.07 1550.57,865.86 1550.57,879.03 1560.99,889.45 1584.06,889.45 v1(1598.81,874.7) v1@1600.77,872.75
DDR_BA1: U1.U3 U17.N8 | length 558.4
  TOP w5: v1(1459.12,518.21) U1.U3@1471.91,505.41 U1.U3@1471.91,506.72 ; v1(1541.72,685.72) U17.N8@1554.52,698.52
  L5 w3.5: v1@1462.44,518.21 1464.81,515.84 1464.81,504.96 1471.96,497.81 1471.96,487.33 1479.47,479.82 1489.94,479.82 1497.48,472.28 1497.48,436.22 1505.07,428.63 1515.55,428.63 1523.08,421.1 1523.08,410.62 1530.61,403.09 1541.17,403.09 1548.64,410.56 1548.64,421.12 1541.12,428.64 1530.65,428.64 1523.07,436.22 1523.07,472.28 1515.55,479.81 1505.07,479.81 1497.55,487.33 1497.55,574.67 1512.15,589.27 1512.15,617.71 1524.98,630.54 1524.98,687.13 1530.7,692.85 1535.82,692.85 1541.72,686.95 v1(1541.72,685.72)
DDR_BA2: U1.R5 U17.M3 | length 520.6
  TOP w5: v1(1510.3,467.02) U1.R5@1523.09,454.23 ; v1(1586.02,835.12) U17.M3@1586.02,856
  L8 w3.5: v1(1510.3,467.02) 1523.14,479.86 1523.14,588.12 1524.98,589.95 1524.98,607.29 1524.98,609.04 1522.6,611.42 1508.62,611.42 1506.25,613.79 1506.25,618.54 1508.62,620.92 1527.35,620.92 1529.73,623.29 1529.73,628.04 1527.35,630.42 1524.98,632.79 1524.98,637.27 1524.98,654.61 1524.98,708 1534.98,718 1581.95,718 1587.97,724.02 1587.97,753.02 1604.72,769.77 1604.72,817.28 1586.88,835.12 v1(1586.02,835.12)
DDR_C\A\S\: U1.V2 U17.K3 | length 505.9
  TOP w5: v1(1433.53,543.8) U1.V2@1446.32,531 ; v1(1649.01,835.12) 1649.01,842.09 U17.K3@1649.01,856
  L10 w3.5: v1(1433.53,543.8) 1416.24,561.09 1416.24,620.6 1435.11,639.48 1453.35,639.48 1463.98,650.11 1463.98,660.34 1473.64,670 1578.36,670 1589.57,681.22 1589.57,701.27 1621.46,733.16 1621.46,805.74 1649.01,833.29 v1(1649.01,835.12)
DDR_C\S\: U1.N6 U17.L2 | length 554.8
  TOP w5: v1(1561.48,441.43) U1.N6@1574.28,428.64 ; U17.L2@1617.51,887.5 v1(1630.31,874.7)
  L5 w3.5: v1(1561.48,441.43) 1548.73,454.18 1548.73,472.21 1541.17,479.77 1530.7,479.77 1523.14,487.33 1523.14,611.12 1558.47,646.45 1558.47,659.6 1558.47,660.34 1567.28,669.15 1580.56,669.15 1589.97,678.55 1589.97,691.83 1600.7,702.57 1601.94,703.81 1601.94,706.81 1599.87,708.89 1599.87,711.89 1602.87,714.9 1605.88,714.9 1607.95,712.82 1610.96,712.82 1611.44,713.31 1611.7,713.31 1621.46,723.07 1621.46,729.67 1621.46,736.27 1621.46,748.92 1632.26,759.72 1632.26,872.75 v1(1630.31,874.7)
DDR_CK_N: R78.1 U1.R1 U17.K7 | length 487
  TOP w5: v1(1510.3,569.39) U1.R1@1523.09,556.59 ; v1(1636.21,742.81) U17.K7@1649.01,730.02
  L10 w3.6: v1(1510.3,569.39) ccw(c1510.3,576.88) 1517.79,576.88 1517.79,577.16 ccw(c1509.46,577.16) 1509.46,585.5 1447.64,585.5 cw(c1447.64,605.88) 1427.27,605.88 cw(c1451.94,605.88) 1451.94,630.55 1516.24,630.55 cw(c1516.24,594.62) 1541.65,620.02 1541.72,619.95 ccw(c1559.84,638.07) 1559.84,612.44 1574.36,612.44 ccw(c1574.44,634.85) 1590.33,619.05 ccw(c1551.3,657.98) 1606.43,657.98 cw(c1626.79,657.98) 1612.38,672.37 ; 1612.39,672.38 1636.21,696.2 ; v1(1636.21,742.81) cw(c1636.21,732.62) 1639.82,742.15 cw(c1636.21,732.62) 1645.74,736.23 cw(c1636.21,732.62) 1646.4,732.62 1646.4,720.8 cw(c1611.62,720.8) 1636.24,696.23
DDR_CK_P: R78.2 U1.P1 U17.J7 | length 487.7
  TOP w5: v1(1535.89,569.39) U1.P1@1548.69,556.59 ; v1(1667.71,742.81) U17.J7@1680.5,730.02
  L10 w3.6: v1(1535.89,569.39) cw(c1535.89,576.88) 1528.39,576.88 1528.39,577.16 ccw(c1509.46,577.16) 1509.46,596.1 1447.64,596.1 cw(c1447.64,605.88) 1437.87,605.88 cw(c1451.94,605.88) 1451.94,619.95 1516.13,619.95 cw(c1516.13,594.36) 1534.23,612.45 1534.28,612.4 ccw(c1559.77,637.89) 1559.77,601.84 1574.54,601.84 ccw(c1574.46,634.8) 1579.08,602.16 1579.54,602.24 ccw(c1574.44,634.85) 1584.47,603.4 ccw(c1574.44,634.85) 1597.52,611.25 1597.9,611.63 ccw(c1551.56,657.87) 1617.03,657.92 cw(c1627.06,657.87) 1619.95,664.95 1646.68,691.68 ccw(c1621.78,716.59) 1657,716.59 1657,732.1 cw(c1667.71,732.1) v1(1667.71,742.81)
DDR_CKE: U1.N7 U17.K9 | length 575.6
  TOP w5: v1(1561.48,415.84) U1.N7@1574.28,403.05 ; v1(1636.21,654.23) U17.K9@1649.01,667.02
  L3 w3.5: v1(1561.48,415.84) 1574.23,403.09 1651.09,403.09 1665,417 1665,417.5 1665,419.26 ccw(c1659.75,419.26) 1659.75,424.51 1659.25,424.51 cw(c1659.25,429.76) 1659.25,435.01 1670.75,435.01 ccw(c1670.75,440.26) 1670.75,445.51 1659.25,445.51 cw(c1659.25,450.76) 1659.25,456.01 1670.75,456.01 ccw(c1670.75,461.26) 1670.75,466.51 1659.25,466.51 cw(c1659.25,471.76) 1659.25,477.01 1670.75,477.01 ccw(c1670.75,482.26) 1670.75,487.51 1659.25,487.51 cw(c1659.25,492.76) 1659.25,498.01 1670.75,498.01 ccw(c1670.75,503.26) 1670.75,508.51 1659.25,508.51 cw(c1659.25,513.76) 1659.25,519.01 1665.14,519.01 ccw(c1665.14,524.26) 1665.14,529.51 1659.75,529.51 cw(c1659.75,534.76) 1659.75,540.01 ccw(c1659.75,545.26) 1665,545.26 1665,554.11 1665,559.32 1665,603.4 1665,625.44 v1(1636.21,654.23)
DDR_DM0: U1.L1 U17.E7 | length 475.7
  TOP w5: U1.L1@1625.46,556.59 1632,563.13 1632,578.38 1638.25,584.63 v1(1638.25,586.81) ; v1(1785,753) 1785,752.25 1806.49,730.76 U17.E7@1806.49,730.02
  L8 w3.5: v1(1638.25,586.81) 1638.25,601.65 1640,603.4 1641.24,604.64 1641.24,608 1636.31,612.93 1636.31,616.29 1639.67,619.65 1643.02,619.65 1653.15,609.52 1656.5,609.52 1659.86,612.88 1659.86,616.24 1649.74,626.36 1649.74,629.72 1653.1,633.08 1656.46,633.08 1664.77,624.77 1668.13,624.77 1671.49,628.13 1671.49,631.49 1669.79,633.19 1669.79,636.55 1673.14,639.91 1676.5,639.91 1682.41,634 1697.64,634 1720,634 1733.04,647.04 1733.04,667.21 1745.52,679.68 1745.52,690.47 1735.36,700.63 1735.36,706.3 1735.36,707.8 1735.36,708.08 1735.36,709.83 1732.98,712.21 1726.52,712.21 1724.15,714.58 1724.15,719.33 1726.52,721.71 1732.98,721.71 1735.36,724.08 1735.36,733.83 1735.36,743.79 1740.29,748.71 1740.29,760.2 1740.29,774.29 1745,779 1759,779 v1(1785,753) v1@1786,752
DDR_DM1: U1.H5 U17.D3 | length 570
  TOP w5: U1.H5@1702.23,454.23 v1(1715.02,467.02) ; v1(1837.98,835.12) 1837.98,842.09 U17.D3@1837.98,856
  L5 w3.5: v1(1715.02,467.02) 1702.27,479.77 1702.27,560.2 1730.58,588.5 1794.26,588.5 1809.16,603.4 1834.03,628.27 1834.03,741.34 1834.03,743.09 ccw(c1829.28,743.09) 1829.28,747.84 1818.78,747.84 cw(c1818.78,752.59) 1818.78,757.34 1847.48,757.34 ccw(c1847.48,762.09) 1847.48,766.84 1838.78,766.84 cw(c1838.78,771.59) 1834.03,771.59 1834.03,823 1834.03,827.79 1836.01,829.77 1837.98,831.74 v1(1837.98,835.12)
DDR_DQ0: U1.N4 U17.E3 | length 514.9
  TOP w5: v1(1561.48,492.61) U1.N4@1574.28,479.82 ; v1(1806.49,835.13) U17.E3@1806.49,856
  L5 w3.5: v1(1561.48,492.61) 1548.73,505.36 1548.73,600.98 1682.46,734.71 1682.46,747.61 1702.9,768.05 1730.56,768.05 1796.2,833.68 1805.04,833.68 v1(1806.49,835.13)
DDR_DQ1: U1.N2 U17.F7 | length 510.8
  TOP w5: v1(1561.48,543.8) U1.N2@1574.28,531 ; v1(1764,743) 1764,742 1774.99,731.01 U17.F7@1774.99,730.02
  L5 w3.5: v1(1561.48,543.8) 1574.32,556.64 1656.64,556.64 1680.02,580.02 1680.02,589.77 1710.31,620.06 1780.26,620.06 1804.1,643.9 1804.1,699.86 1802.35,701.62 1772.2,701.62 1769.83,703.99 1769.83,708.74 1772.2,711.12 1798.61,711.12 1800.98,713.49 1800.98,718.24 1798.61,720.62 1783.35,720.62 1766.34,737.62 v1@1764,739.96 ; v1@1762.72,741.24 v1@1764,739.96 ; v1(1764,743) 1764,741.24 v1@1764,739.96
DDR_DQ2: U1.N1 U17.F2 | length 508.1
  TOP w5: v1(1561.48,569.39) U1.N1@1574.28,556.59 ; U17.F2@1774.99,887.5 v1(1787.79,874.7)
  L5 w3.5: v1(1561.48,569.39) 1560.47,570.4 1560.47,597.28 1566.59,603.4 1574.3,611.12 1613.96,611.12 1673.82,670.97 1674,670.97 1699.2,696.18 1709.7,696.18 1743.5,729.98 1743.5,751.27 1780.32,788.1 1780.32,797.14 1800.38,817.2 1814.26,817.2 1821.24,824.18 1821.24,841.25 1804.51,857.98 1793.02,857.98 1787.79,863.21 v1(1787.79,874.7)
DDR_DQ3: U1.M2 U17.F8 | length 508.3
  TOP w5: v1(1573.22,586.81) 1587.07,572.96 1587.07,543.42 1599.49,531 U1.M2@1599.87,531 ; U17.F8@1774.99,698.52 v1(1787.79,685.72)
  L5 w3.5: v1(1573.22,586.81) 1608.16,586.81 1626.58,605.23 1634.54,613.19 1637.89,613.19 1646,605.08 1649.36,605.08 1652.72,608.44 1652.72,611.8 1641.37,623.15 1641.37,626.51 1644.73,629.87 1648.09,629.87 1672.87,605.08 1676.23,605.08 1679.59,608.44 1679.59,611.8 1654.81,636.58 1654.81,639.94 1658.17,643.3 1661.52,643.3 1689.85,614.98 1693.21,614.98 1696.57,618.33 1696.57,621.69 1683.73,634.53 1683.73,637.89 1687.08,641.25 1690.44,641.25 1698.99,632.71 1702.35,632.71 1750.72,681.08 1755.36,685.72 v1(1787.79,685.72)
DDR_DQ4: U1.M4 U17.H3 | length 474.1
  TOP w5: v1(1587.07,492.61) U1.M4@1599.87,479.82 ; v1(1712,835.12) U17.H3@1712,856
  L8 w3.5: v1(1587.07,492.61) 1574.32,505.36 1574.32,562.32 1589.97,577.97 1589.97,691.83 1617.13,719 1617.13,734.37 1621.46,738.7 1621.46,796.25 1644.56,819.35 1696.22,819.35 v1(1712,835.12)
DDR_DQ5: U1.L3 U17.H8 | length 477.7
  TOP w5: v1(1612.66,518.21) U1.L3@1625.46,505.41 ; U17.H8@1712,698.52 1712.17,698.52 1727.69,683 v1(1727.85,683)
  L8 w3.5: v1(1612.66,518.21) 1625.5,531.05 1625.5,617.5 1662,654 1680.5,654 1683.63,657.13 1683.63,664.58 1681,667.21 1651.01,667.21 1642.83,675.39 1642.83,687.61 1659.46,704.24 1659.46,719.44 1666.82,726.8 1673.2,726.8 1678.27,721.73 1678.27,710.73 1674.22,706.69 1674.22,699.66 1683.49,690.39 1683.49,687.49 1676.59,680.59 1676.59,677.44 1678.64,675.39 1691.25,675.39 1698.3,682.44 1698.3,686.01 1712.92,700.63 1720.35,700.63 1727.35,693.63 1727.35,683.5 v1(1727.85,683)
DDR_DQ6: U1.K1 U17.G2 | length 474.1
  TOP w5: U1.K1@1651.05,556.59 v1(1651.05,570.87) ; U17.G2@1743.5,887.5 v1(1756.29,874.7)
  L8 w3.5: v1(1651.05,570.87) 1652.42,572.24 1652.42,593.42 1662.4,603.4 1684.1,625.1 1757.1,625.1 1773.04,641.04 1773.04,699.4 1778.75,705.11 1779.99,706.35 1779.99,709.71 1776.68,713.02 1776.68,716.38 1780.04,719.74 1783.4,719.74 1786.71,716.43 1790.07,716.43 1804,730.36 1804,758.39 1758.25,804.14 1758.25,821.75 ; v1@1757,875 1758.25,873.75 1758.25,823
DDR_DQ7: U1.L4 U17.H7 | length 474.3
  TOP w5: v1(1612.66,492.61) U1.L4@1625.46,479.82 ; v1(1699.2,742.81) U17.H7@1712,730.02
  L8 w3.5: v1(1612.66,492.61) 1599.91,505.36 1599.91,577 1599.91,594.57 1608.75,603.4 1612.66,607.31 1612.66,612.23 1612.66,613.98 1610.29,616.35 1600.84,616.35 1598.47,618.73 1598.47,623.48 1600.84,625.85 1619.46,625.85 1621.83,628.23 1621.83,632.98 1619.46,635.35 1600.84,635.35 1598.47,637.73 1598.47,642.48 1600.84,644.85 1618.95,644.85 1621.33,647.23 1621.33,651.98 1618.95,654.35 1615.04,654.35 1612.66,656.73 1612.66,666.2 1612.66,672.81 1625.58,685.72 1650.96,711.11 1650.96,756.72 1658.26,764.02 1693.3,764.02 1699.2,758.12 v1(1699.2,742.81)
DDR_DQ8: U1.J1 U17.D7 | length 536.2
  TOP w5: U1.J1@1676.64,556.59 v1(1689.43,569.39) ; U17.D7@1837.98,730.02 v1(1850.78,717.22)
  L8 w3.5: v1(1689.43,569.39) 1719.39,569.39 1735.85,585.85 1745.52,585.85 1747.27,585.85 1749.64,588.22 1749.64,598.1 1752.02,600.48 1756.77,600.48 1759.14,598.1 1759.14,584.51 1761.52,582.14 1766.27,582.14 1768.64,584.51 1768.64,598.1 1771.02,600.48 1775.77,600.48 1778.14,598.1 1778.14,584.51 1780.52,582.14 1785.27,582.14 1787.64,584.51 1787.64,599 1790.02,601.38 1794.77,601.38 1797.14,599 1797.14,584.51 1799.52,582.13 1804.27,582.13 1806.64,584.51 1806.64,601.03 1809.02,603.4 1813.77,603.4 1816.14,601.03 1816.14,569.22 1818.52,566.85 1823.27,566.85 1825.64,569.22 1825.64,599.24 1829.8,603.4 1831.04,604.64 1831.04,608 1824.14,614.9 1824.14,618.26 1827.5,621.62 1830.86,621.62 1837.76,614.72 1841.12,614.72 1862.02,635.62 1865.53,639.13 1865.53,690.47 1873.32,698.26 1873.32,711.61 1865.49,719.44 1853,719.44 v1(1850.78,717.22)
DDR_DQ9: U1.K2 U17.C3 | length 535.7
  TOP w5: v1(1638.25,543.8) U1.K2@1651.05,531 ; v1(1869.48,835.13) U17.C3@1869.48,856
  L8 w3.5: v1(1638.25,543.8) 1651.75,543.8 1665,557.04 1665,588 1680.4,603.4 1692.48,615.48 1777.48,615.48 1804.53,642.53 1804.53,704.9 1822.27,722.63 1822.27,729.46 1822.27,731.21 1819.89,733.59 1814.88,733.59 1812.5,735.96 1812.5,740.71 1814.88,743.09 1823.2,743.09 1825.58,745.46 1825.58,750.21 1823.2,752.59 1814.88,752.59 1812.5,754.96 1812.5,759.71 1814.88,762.09 1827.57,762.09 1829.94,764.46 1829.94,769.21 1827.57,771.59 1824.64,771.59 1822.27,773.96 1822.27,796.13 1824.83,798.69 1845.48,819.35 1859.5,833.37 1867.72,833.37 v1(1869.48,835.13)
DDR_DQ10: U1.J3 U17.C8 | length 536.9
  TOP w5: U1.J3@1676.64,505.41 v1(1689.43,518.21) ; U17.C8@1869.48,698.52 v1(1882.28,685.72)
  L8 w3.5: v1(1689.43,518.21) 1702.27,531.05 1702.27,549.08 1709.74,556.55 1827.1,556.55 1897.82,627.27 1897.82,707 1902.93,712.1 1902.93,755.27 1898.2,760 1878.6,760 1873.32,754.72 1873.32,732.98 1882.28,724.02 v1(1882.28,685.72)
DDR_DQ11: U1.K3 U17.C2 | length 551.4
  TOP w5: v1(1638.25,518.21) 1638.25,517.83 1650.67,505.41 U1.K3@1651.05,505.41 ; U17.C2@1869.48,887.5 v1(1882.28,874.7)
  L8 w3.5: v1(1638.25,518.21) 1673.05,553 1673.05,580.92 1695.53,603.4 1699.11,606.98 1781,606.98 1784.38,607 1812.25,634.87 1822.27,634.87 1834.08,646.68 1834.08,754.2 1884.23,804.36 1884.23,872.75 v1(1882.28,874.7)
DDR_DQ12: U1.J4 U17.A7 | length 535.7
  TOP w5: U1.J4@1676.64,479.82 v1(1689.43,492.61) ; v1(1919.68,742.81) U17.A7@1932.47,730.02
  L8 w3.5: v1(1689.43,492.61) 1702.18,505.36 1720.21,505.36 1727.82,512.97 1727.82,523.44 1735.36,530.98 1819.16,530.98 1894.53,606.35 1902.48,614.31 1905.84,614.31 1906.71,613.43 1910.07,613.43 1913.43,616.79 1913.43,620.15 1912.56,621.02 1912.56,624.38 1928.52,640.35 1928.52,658.73 1928.52,664.58 1928.52,666.94 1928.52,697.19 1930.9,699.57 1935.88,699.57 1938.25,701.94 1938.25,706.69 1935.88,709.07 1913.81,709.07 1911.43,711.44 1911.43,716.19 1913.81,718.57 1945.15,718.57 1947.52,720.94 1947.52,725.69 1945.15,728.07 1930.9,728.07 1928.52,730.44 1928.52,732.92 1920.1,741.34 1919.68,741.77 v1(1919.68,742.81)
DDR_DQ13: U1.H4 U17.A2 | length 571.7
  TOP w5: U1.H4@1702.23,479.82 v1(1715.02,492.61) ; U17.A2@1932.47,887.5 v1(1945.27,874.7)
  L5 w3.5: v1(1715.02,492.61) 1727.86,505.46 1745.9,505.46 1753.41,512.97 1753.41,523.44 1770.97,541 1793,541 1866,614 1866,706.76 1876.46,717.22 1926.82,717.22 1947.22,737.62 v1@1947.22,874.22
  L8 w3.5: v1(1715.02,492.61) v1@1716.66,492.61 ; v1@1945,877 v1@1947.22,874.78
DDR_DQ14: U1.J5 U17.B8 | length 570.7
  TOP w5: U1.J5@1676.64,454.23 v1(1689.43,467.02) ; U17.B8@1900.98,698.52 v1(1913.77,685.72)
  L5 w3.5: v1(1689.43,467.02) 1702.18,454.27 1722.6,454.27 1748.1,479.77 1763,479.77 1763.09,479.86 1771.49,479.86 1779,487.38 1779,497.85 1786.54,505.39 1797.01,505.39 1804.56,512.94 1804.56,530.56 1837,563 1860,563 ; 1860.06,562.94 1861.66,564.54 1875.87,578.75 1877.11,579.99 1877.11,583.35 1870.65,589.81 1870.65,593.17 1874.01,596.53 1877.37,596.53 1883.83,590.07 1887.19,590.07 1892.32,595.2 1897.03,599.9 1897.03,600.17 1897.03,604.6 1897.03,606.35 1894.65,608.73 1876.88,608.73 1874.5,611.1 1874.5,615.85 1876.88,618.23 1919.65,618.23 1922.03,620.6 1922.03,625.35 1919.65,627.73 1876.88,627.73 1874.5,630.1 1874.5,634.85 1876.88,637.23 1894.65,637.23 1897.03,639.6 1897.03,643.3 1897.03,659.6 1897.03,667.59 1913,683.57 v1@1913,687
DDR_DQ15: U1.G4 U17.A3 | length 535.1
  TOP w5: U1.G4@1727.82,479.82 v1(1740.61,492.61) ; v1(1932.47,835.13) U17.A3@1932.47,856
  L8 w3.5: v1(1740.61,492.61) 1753.36,505.36 1822.58,505.36 1842.98,525.76 1842.98,540.98 1859.04,557.04 1873.32,557.04 1919.68,603.4 1963,646.73 1963,792.84 1963,804.6 v1(1932.47,835.13)
DDR_DQS0_N: U1.N3 U17.G3 | length 453.2
  TOP w5: v1(1561.48,518.21) U1.N3@1574.28,505.41 ; v1(1743.5,835.13) U17.G3@1743.5,856
  L10 w3.6: v1(1561.48,518.21) ccw(c1561.48,533.2) 1576.47,533.2 1576.47,558.26 cw(c1610.75,558.26) 1586.51,582.5 1607.41,603.4 1729.39,725.38 ccw(c1710.93,743.79) 1737,743.79 1737,748.77 cw(c1762.61,748.77) 1744.5,766.88 1766.2,788.58 ccw(c1754.79,800) 1770.93,800 ccw(c1758.28,800) 1767.24,808.94 1756.55,819.63 cw(c1762.84,825.92) 1753.94,825.92 1753.94,827.38 ccw(c1748.57,827.38) 1752.37,831.18 ccw(c1748.57,827.38) 1748.57,832.75 cw(c1748.57,839.27) 1743.96,834.66 v1(1743.5,835.13)
DDR_DQS0_P: U1.M3 U17.F3 | length 453.3
  TOP w5: v1(1587.07,518.21) U1.M3@1599.87,505.41 ; v1(1774.99,835.12) U17.F3@1774.99,856
  L10 w3.6: v1(1587.07,518.21) 1587.07,528.69 1587.07,540.09 1589.47,542.49 1591.89,542.49 1594.29,544.89 1594.29,549.69 1591.89,552.09 1589.47,552.09 1587.07,554.49 1587.07,557.53 cw(c1609.06,557.53) 1587.07,557.64 cw(c1612.55,557.52) 1594.53,575.53 1737.03,718.03 ccw(c1710.86,744.2) 1747.6,748.7 cw(c1762.78,748.7) 1752.05,759.43 1773.76,781.14 ccw(c1754.98,799.92) 1781.53,799.92 1781.53,800.09 ccw(c1758.51,800.09) 1774.79,816.38 1765.6,825.57 cw(c1768.14,828.11) 1764.54,828.11 cw(c1768.14,828.11) 1765.6,830.66 1765.95,831.01 cw(c1770.16,826.8) 1770.16,832.75 ccw(c1770.16,838.7) 1774.36,834.49 v1(1774.99,835.12)